# Altium PCB PCB5.PcbDoc
Units mil, origin at the board's own origin, x right, y up, seen from the top; angles counter-clockwise.
Board outline 5000 x 4000 mil, 4 copper layers (Top Layer, Internal Plane 1, Internal Plane 2, Bottom Layer); 4 components, 24 nets, 72 pads, 0 vias.
Unrouted connection lines stored in the file: 24.
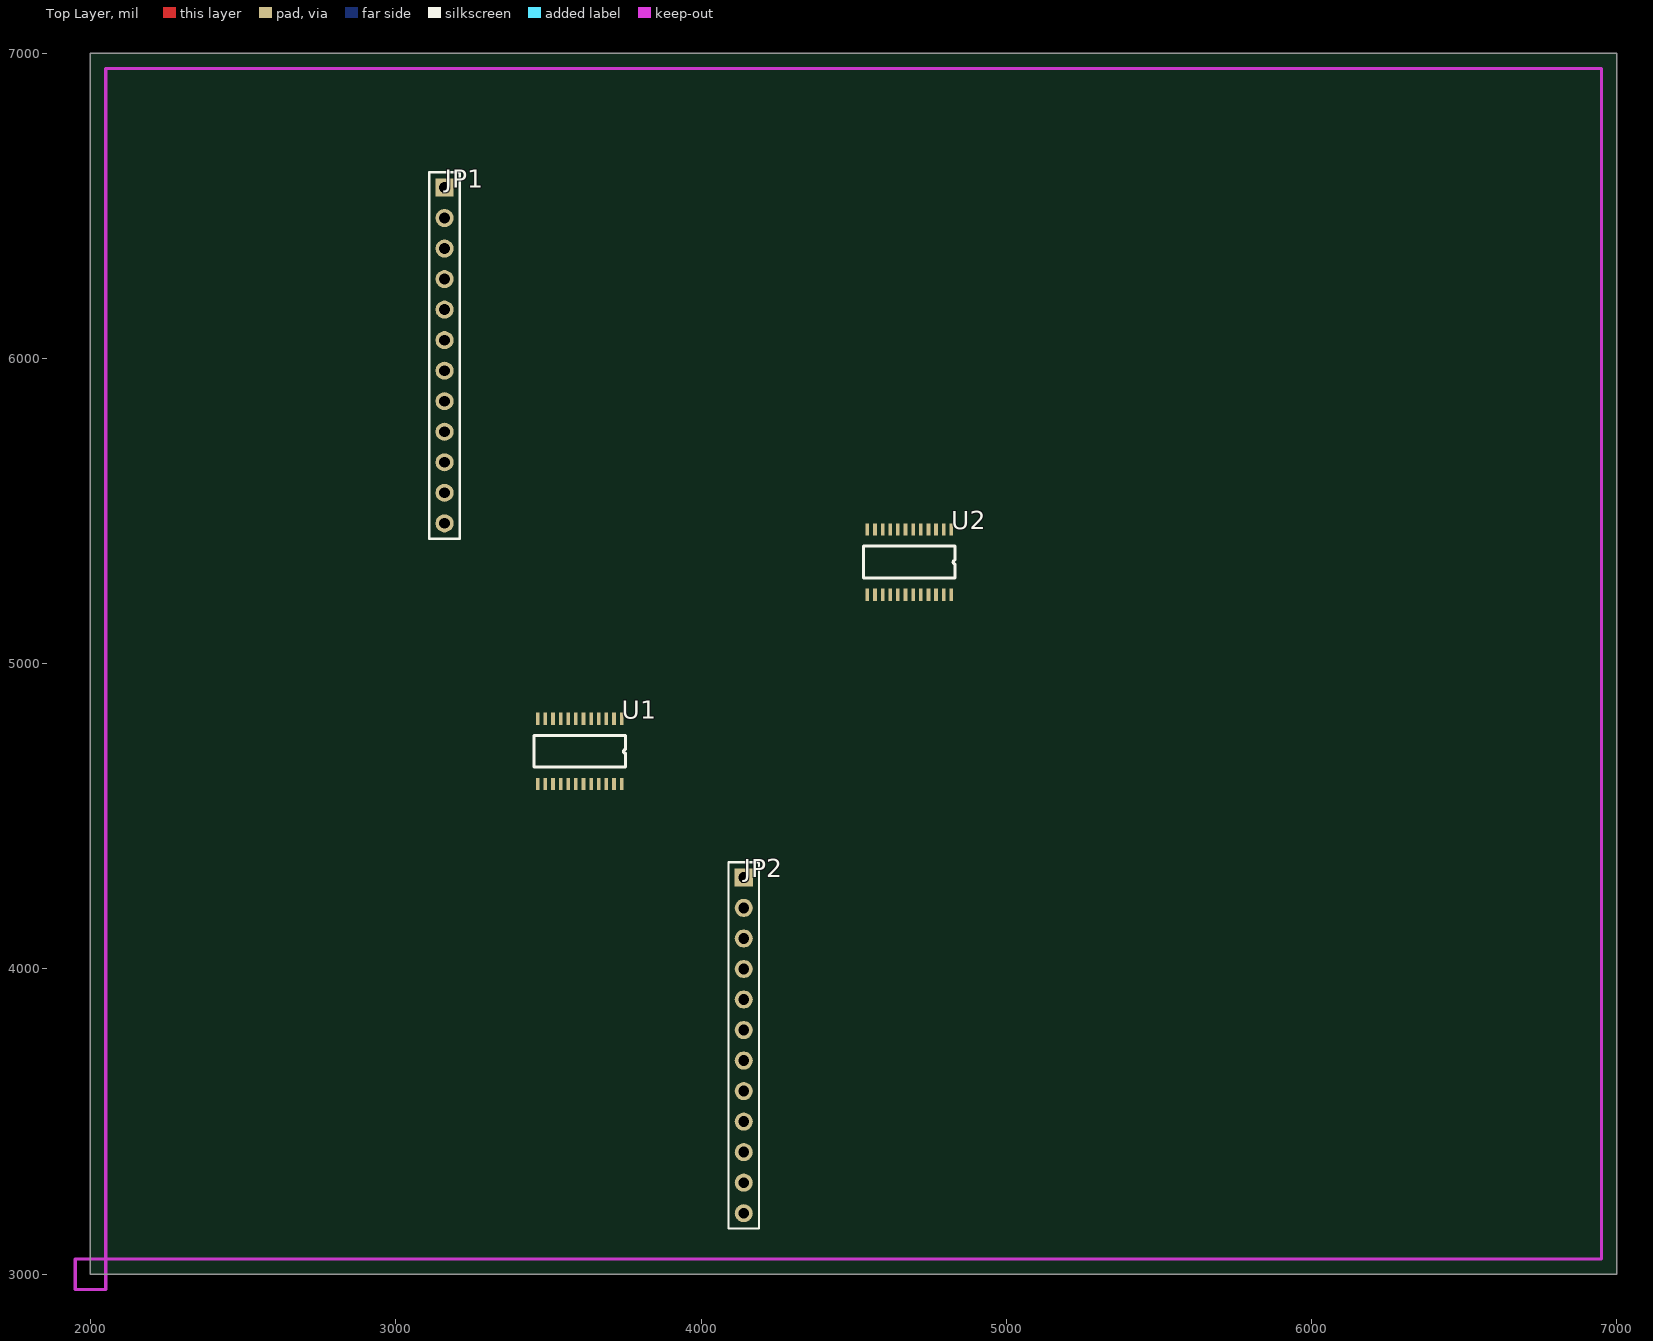
[diagram p0: Top Layer view]
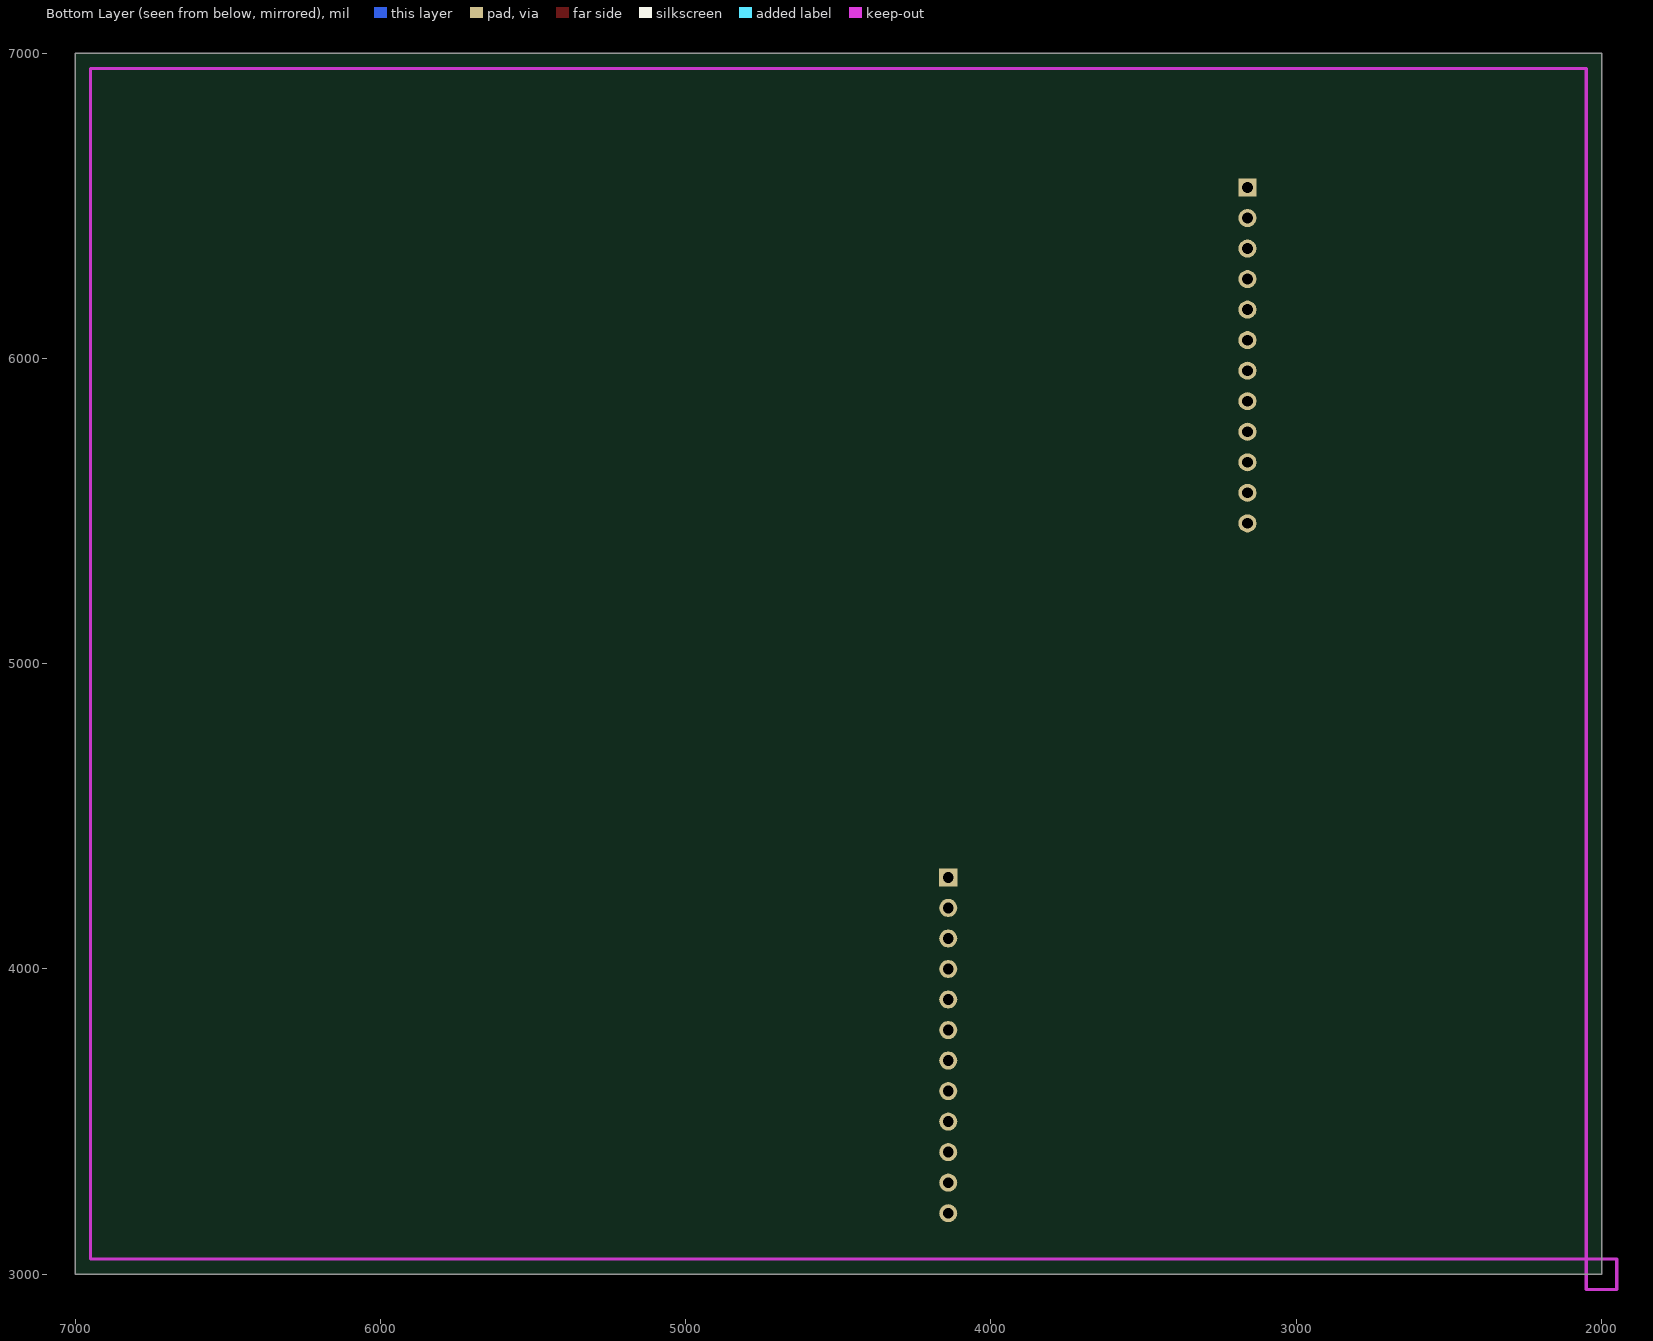
[diagram p1: Bottom Layer view, seen from below]
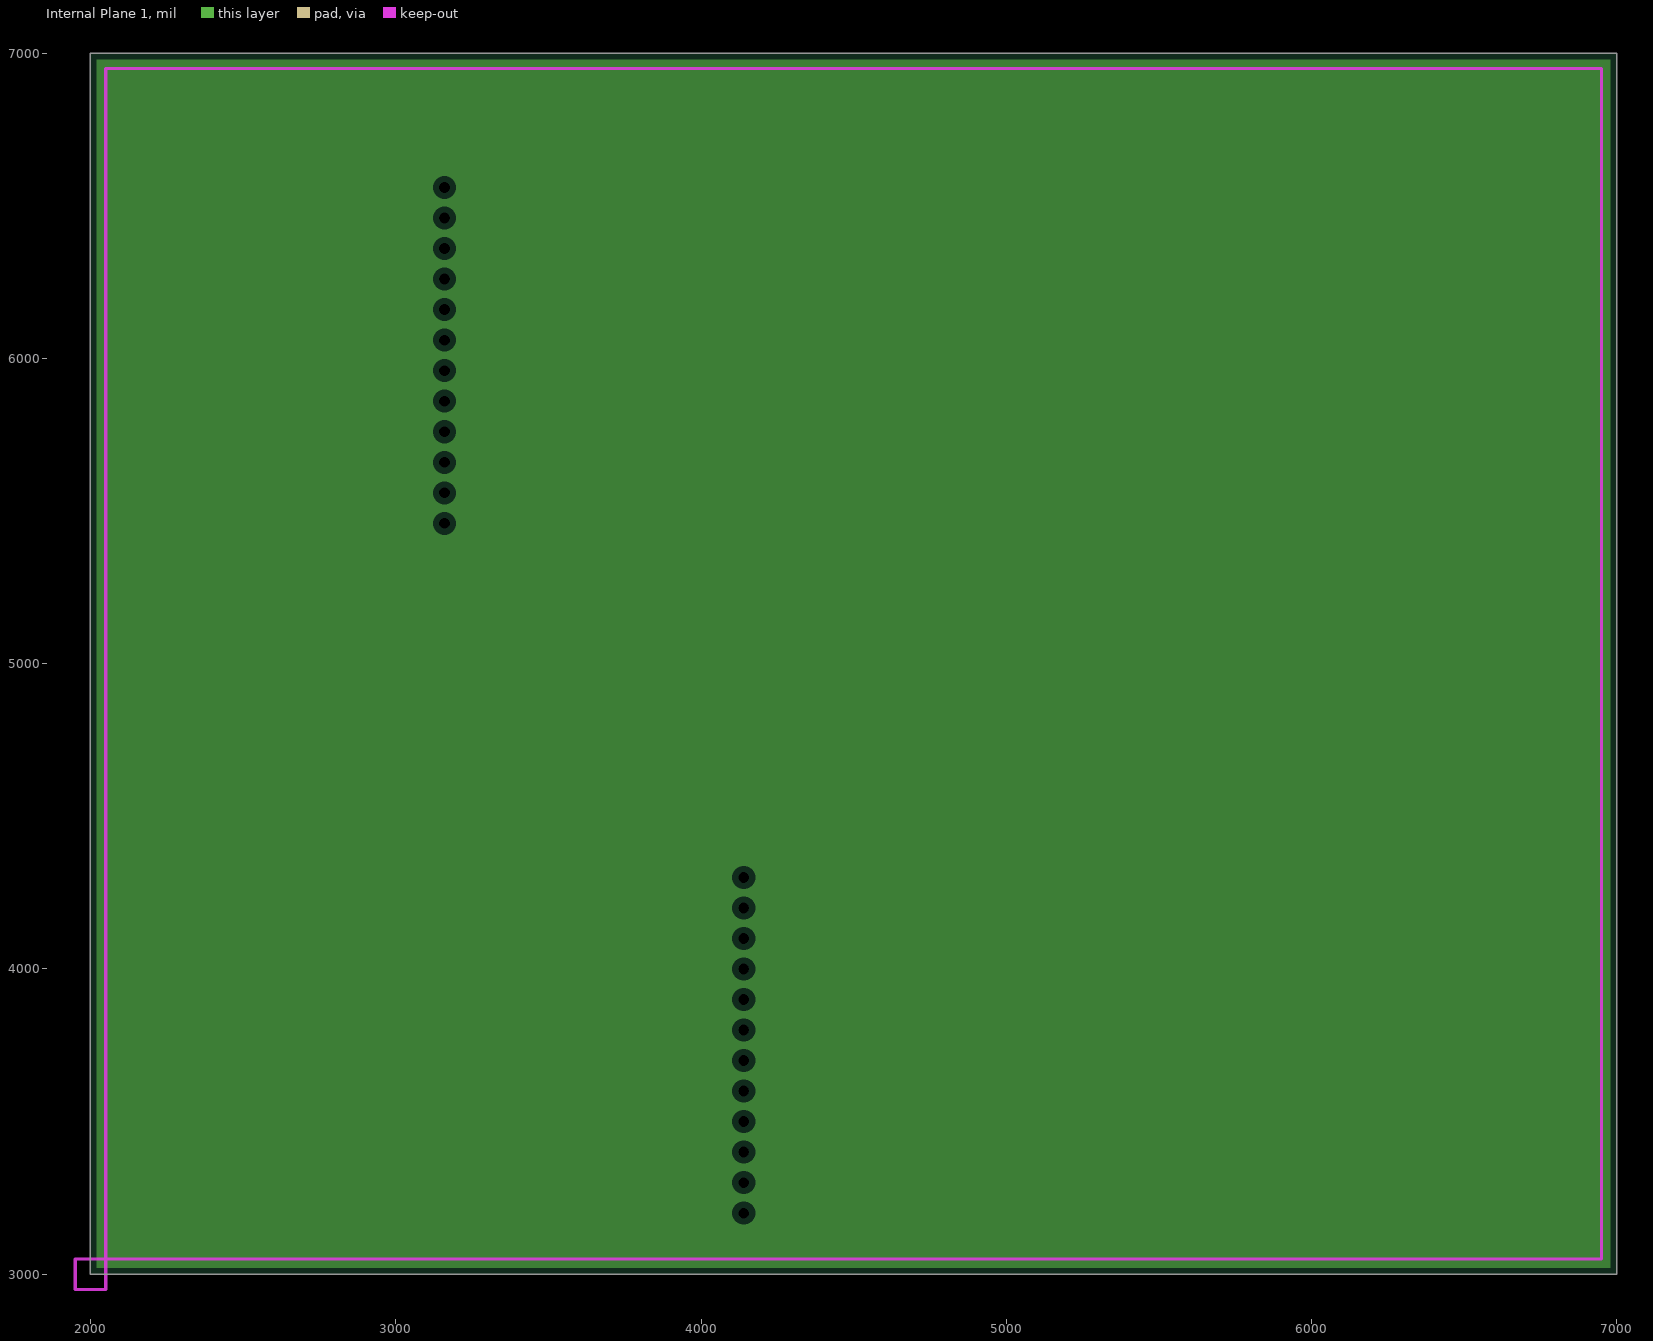
[diagram p2: Internal Plane 1, clearances drawn from the general rule]
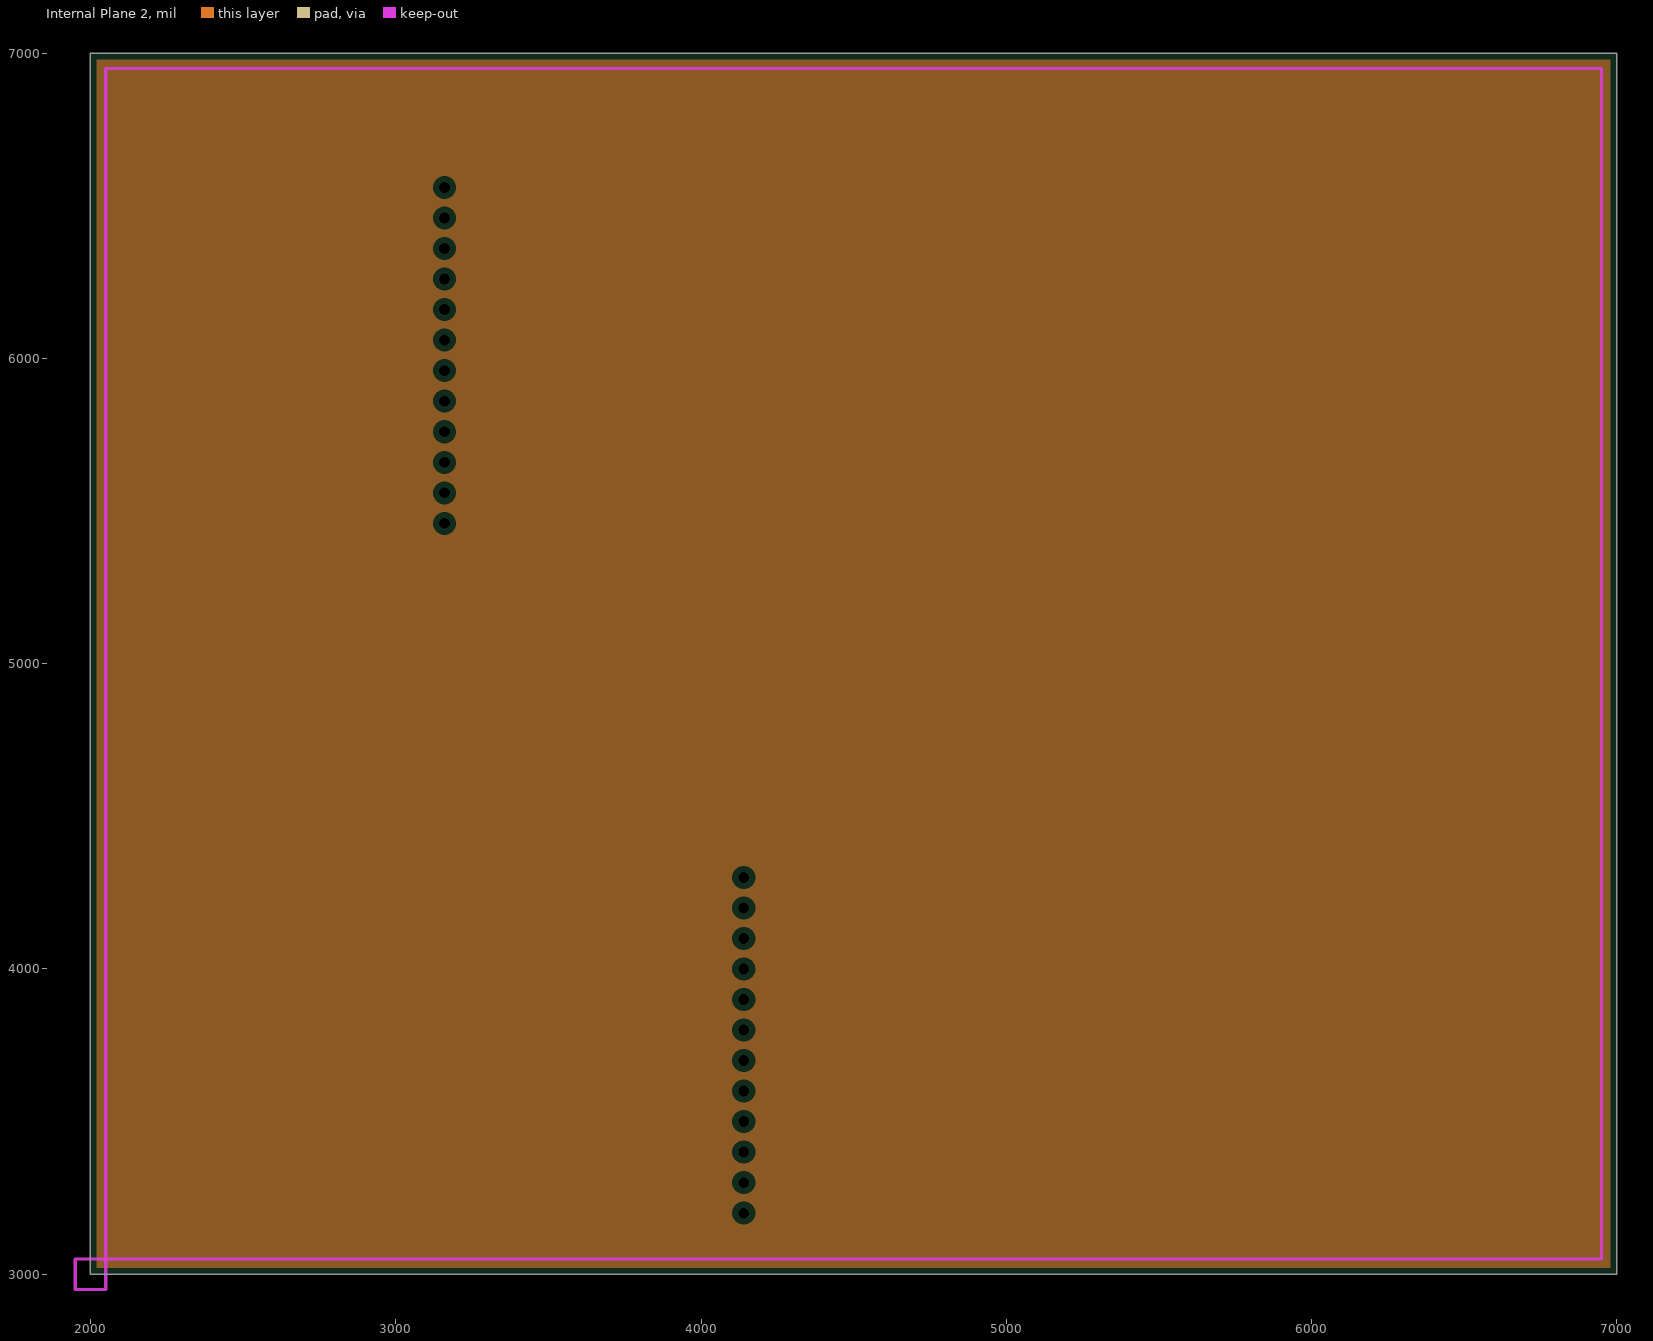
[diagram p3: Internal Plane 2, clearances drawn from the general rule]

## Layer stack, top to bottom
Top Layer: signal copper 1.4
Dielectric: dielectric 12.6, FR-4, Dk 4.8
Internal Plane 1: plane copper 1.4
Dielectric: dielectric 12.6, FR-4, Dk 4.8
Internal Plane 2: plane copper 1.4
Dielectric: dielectric 12.6, FR-4, Dk 4.8
Bottom Layer: signal copper 1.4

## Board outline
2000,3000 7000,3000 7000,7000 2000,7000

## Design rules (kind name [scope] priority, off if disabled: settings)
Clearance [All] p1: gap=8
ComponentClearance [All] p1: gap=10 collisioncheckmode=3 verticalgap=10
PlaneClearance [All] p1: clearance=20
PlaneConnect [All] p1: planeconnectstyle=Relief reliefexpansion=20 reliefentries=4 reliefconductorwidth=10 reliefairgap=10
PolygonConnect [All] p1: connectstyle=Relief reliefconductorwidth=10 reliefentries=4 polygonreliefangle="90 Angle"
RoomDefinition Sheet3 [InComponentClass('Sheet3')] p1: confinementstyle=ConfineIn formatcopy=TRUE lockcomponents=FALSE outline 0,0 2000,0 2000,1000 0,1000
RoomDefinition Sheet1 [InComponentClass('Sheet1')] p2: confinementstyle=ConfineIn formatcopy=TRUE lockcomponents=FALSE outline 0,0 2000,0 2000,1000 0,1000
RoutingVias [All] p1: holewidth=25 width=40 viastyle="Through Hole" minholewidth=28 minwidth=50 maxholewidth=28 maxwidth=50
SolderMaskExpansion [All] p1: expansion=4
TestPointUsage [All] p1: valid=0 allowmultiple=FALSE
Testpoint [All] p1: side=15 testpointundercomponent=TRUE minsize=40 maxsize=100 preferedsize=60 minholesize=0 maxholesize=40 preferedholesize=32 testpointgrid=1 style=1023 order=0123456789
Width [All] p1: maxlimit=8 minlimit=8 preferedwidth=8
16 further rules are at their usual default settings.

## Classes and differential pairs
component class Sheet3: U1 U2
component class Sheet1: JP1 JP2

## Components (designator, comment, footprint, x,y, rotation, side; value= is the part's Value field where it differs from the comment)
JP1 "Header 12" HDR1X12 3160,6560 r270 top
JP2 "Header 12" HDR1X12 4140,4300 r270 top
U1 "MAX7313" QSOP24 3740,4820 r270 top
U2 "MAX7313" QSOP24 4820,5440 r270 top

## Footprints (in the part's own frame and the unit in brackets; to place one, negate y for a bottom-side part, rotate by r counter-clockwise, add the part's x,y. Pads: shape width x height; smd on the part's side, far side on the other; paste and mask are expansions set on the pad)
HDR1X12 [mm] "Connector; Header; 12 Position"
  rect 1.5x1.5 hole 0.9: 1(0,0)
  round 1.5 hole 0.9: 2(2.54,0) 3(5.08,0) 4(7.62,0) 5(10.16,0) 6(12.7,0) 7(15.24,0) 8(17.78,0) 9(20.32,0) 10(22.86,0) 11(25.4,0) 12(27.94,0)
  silkscreen extent -1.27,-1.27 29.21,1.27
QSOP24 [mil]
  rect 40x12 smd: 1(0,0) 2(0,-25) 3(0,-50) 4(0,-75) 5(0,-100) 6(0,-125) 7(0,-150) 8(0,-175) 9(0,-200) 10(0,-225) 11(0,-250) 12(0,-275) 13(214,-275) 14(214,-250) 15(214,-225) 16(214,-200) 17(214,-175) 18(214,-150) 19(214,-125) 20(214,-100) 21(214,-75) 22(214,-50) 23(214,-25) 24(214,0)
  silkscreen extent 55,-288 159,13

## Part data
JP1 JP2: "Header, 12-Pin"

## Nets (pads, with @x,y where several pads share a name; then routed paths per layer and width w, separated by ;. In a path a pad name is that pad's centre, name@x,y a point inside that pad or via, vN(x,y) a via of type N, cw(c..) or ccw(c..) an arc to the next point about the centre after c; other vN are vias at no path point)
NetJP1_1: JP1.1 U1.1
NetJP1_2: JP1.2 U1.2
NetJP1_3: JP1.3 U1.3
NetJP1_4: JP1.4 U1.4
NetJP1_5: JP1.5 U1.5
NetJP1_6: JP1.6 U1.6
NetJP1_7: JP1.7 U1.7
NetJP1_8: JP1.8 U1.8
NetJP1_9: JP1.9 U1.9
NetJP1_10: JP1.10 U1.10
NetJP1_11: JP1.11 U1.11
NetJP1_12: JP1.12 U1.12
NetJP2_1: JP2.1 U1.24
NetJP2_2: JP2.2 U1.23
NetJP2_3: JP2.3 U1.22
NetJP2_4: JP2.4 U1.21
NetJP2_5: JP2.5 U1.20
NetJP2_6: JP2.6 U1.19
NetJP2_7: JP2.7 U1.18
NetJP2_8: JP2.8 U1.17
NetJP2_9: JP2.9 U1.16
NetJP2_10: JP2.10 U1.15
NetJP2_11: JP2.11 U1.14
NetJP2_12: JP2.12 U1.13
pads on no net: U2.1 U2.2 U2.3 U2.4 U2.5 U2.6 U2.7 U2.8 U2.9 U2.10 U2.11 U2.12 U2.13 U2.14 U2.15 U2.16 U2.17 U2.18 U2.19 U2.20 U2.21 U2.22 U2.23 U2.24

## Polygon pours and split planes (outlines as drawn)
no net on Internal Plane 1 (split plane): 6979.61,3020.39 2020.39,3020.39 2020.39,6979.61 6979.61,6979.61
no net on Internal Plane 2 (split plane): 6979.61,3020.39 2020.39,3020.39 2020.39,6979.61 6979.61,6979.61

## Keep-outs
Keep-Out Layer:
  lines w10: 2050,3050 1950,3050 1950,2950 2050,2950 2050,3050 ; 2050,3050 2050,6950 6950,6950 6950,3050 2050,3050

## Silkscreen, mask and mechanical layers (free items; w line width, h text height)
Drill Drawing:
  text ".LEGEND" at 7200,3200 h60
  text "Drill Drawing." at 7200,3100 h60

## Dimensions
2000,3000 to 2050,3050 on Mechanical 1
2000,3000 to 2050,3050 on Mechanical 1